# Altium PCB pcb.PcbDoc
Units mil, origin at the board's own origin, x right, y up, seen from the top; angles counter-clockwise.
Board outline 1440 x 940 mil, 2 copper layers (Top Layer, Bottom Layer), stack 62.8 mil thick; 26 components, 26 nets, 87 pads, 20 vias.
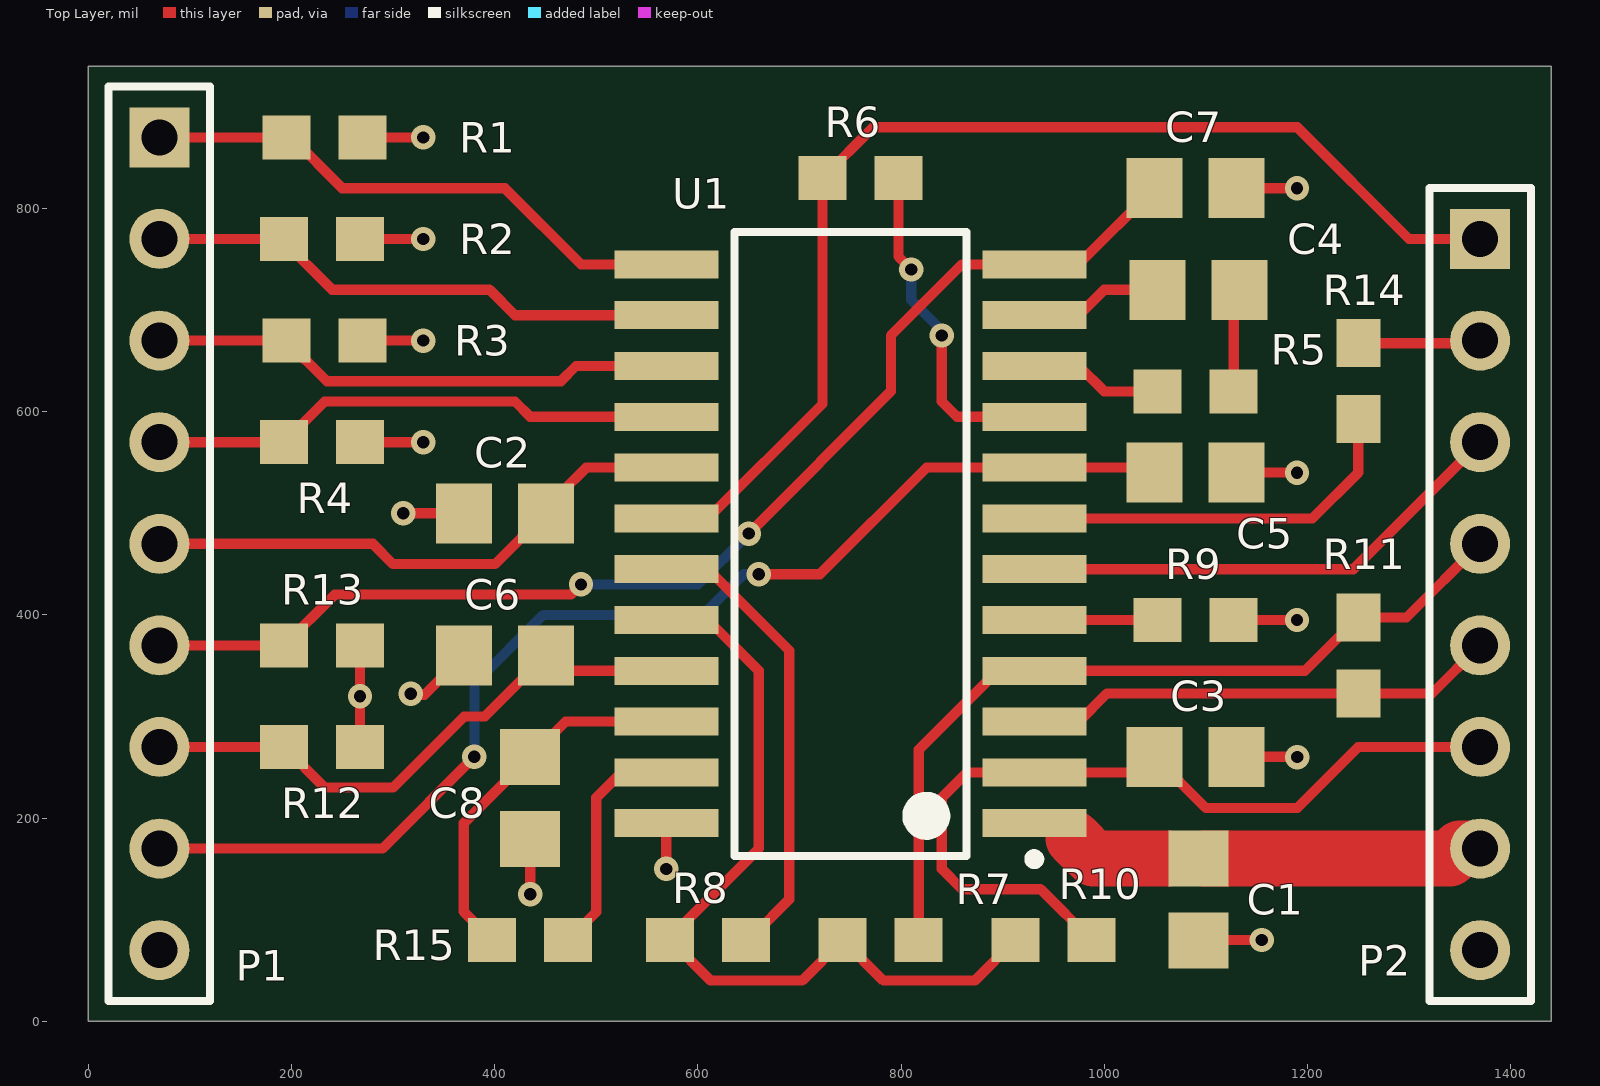
[diagram p0: Top Layer view]
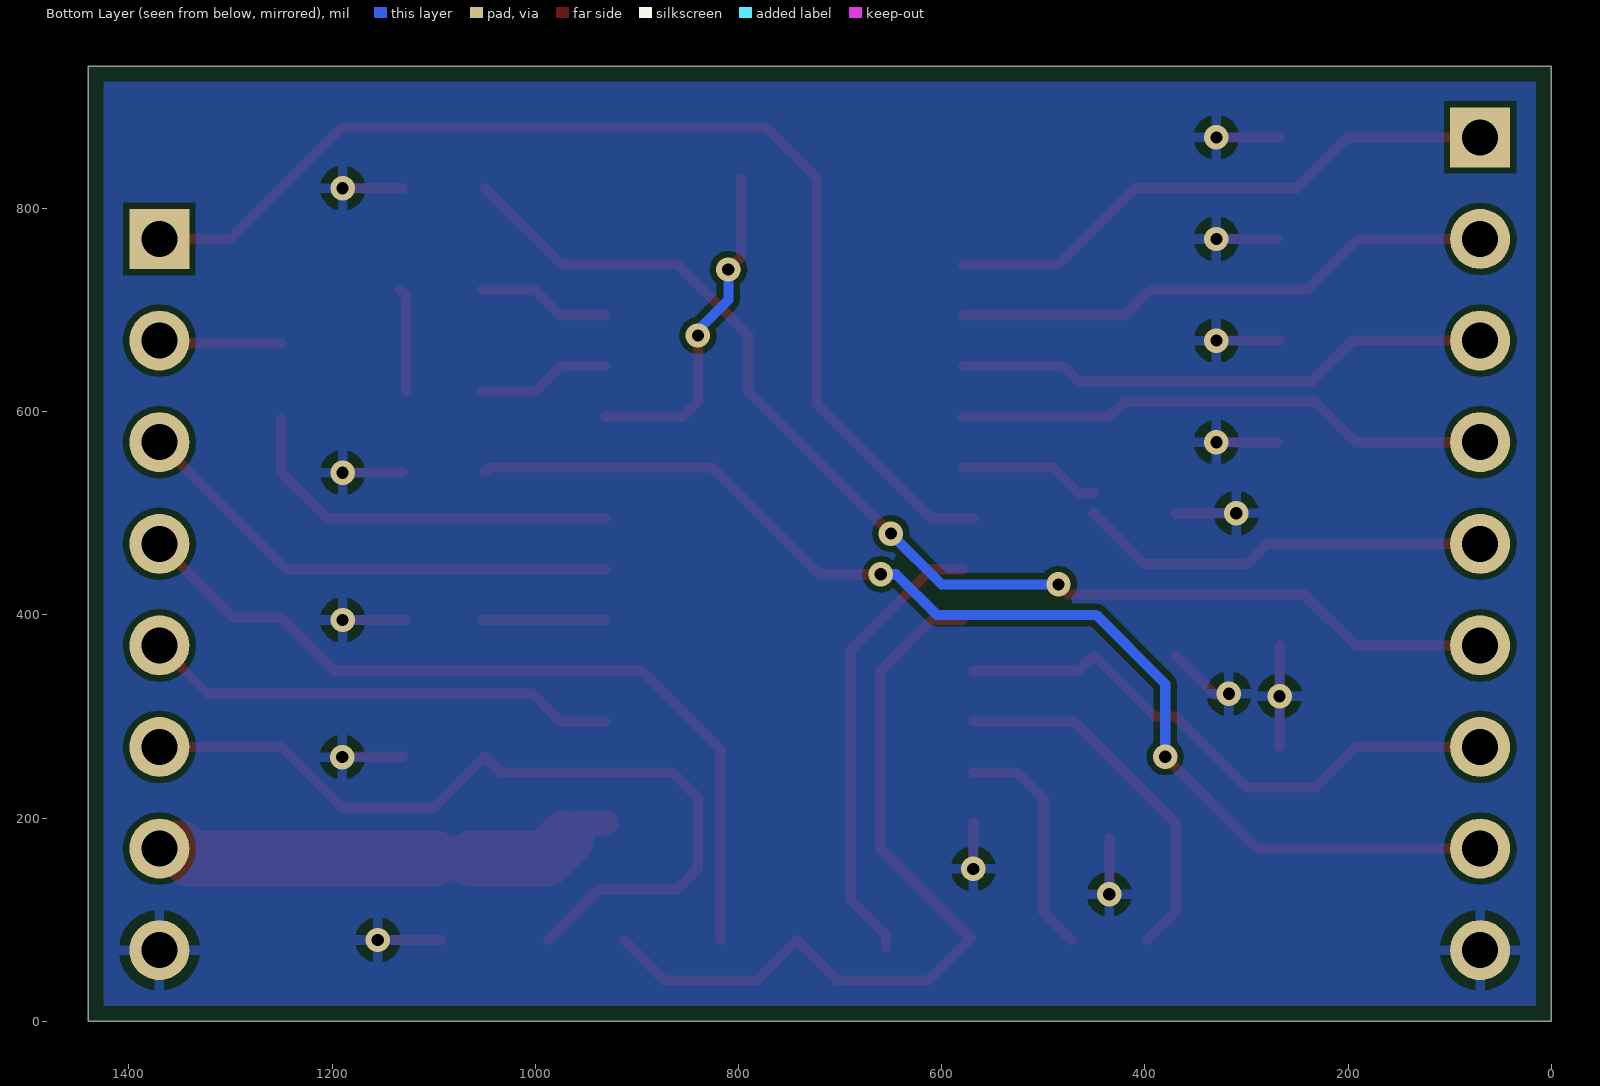
[diagram p1: Bottom Layer view, seen from below]

## Layer stack, top to bottom
Top Solder: solder mask 1, Solder Resist, Dk 3.5
Top Layer: signal copper 1.4
Dielectric 1: core 60, FR4, Dk 4.6
Bottom Layer: signal copper 1.4
Bottom Solder: solder mask 1, Solder Resist, Dk 3.5

## Board outline
0,0 1440,0 1440,940 0,940

## Design rules (kind name [scope] priority, off if disabled: settings)
BoardOutlineClearance [All] p1: gap=15 ignorepadtopadclearanceinfootprint=FALSE
Clearance [All] p1: gap=6 ignorepadtopadclearanceinfootprint=FALSE
HoleSize [All] p1: absolutevalues=TRUE maxlimit=100 minlimit=10 maxpercent=80.000 minpercent=20.000
MinimumAnnularRing [All] p1: minimumring=5
MinimumSolderMaskSliver [All] p1: minsoldermaskwidth=4
PlaneConnect [All] p1: planeconnectstyle=Direct reliefexpansion=20 reliefentries=4 reliefconductorwidth=10 reliefairgap=10
PolygonConnect [All] p1: connectstyle=Relief reliefconductorwidth=10 reliefentries=4 polygonreliefangle="90 Angle" airgapwidth=10
RoutingVias [All] p1: holewidth=6 width=16 viastyle="Through Hole" minholewidth=6 minwidth=16 maxholewidth=28 maxwidth=50
SolderMaskExpansion [All] p1: expansion=4
Width [All] p1: maxlimit=100 minlimit=6 preferedwidth=10 minimp=50.000000 maximp=50.000000 favimp=50.000000
27 further rules are at their usual default settings.

## Components (designator, comment, footprint, x,y, rotation, side; value= is the part's Value field where it differs from the comment)
C1 "Generic 0805 Capacitor" 0805 1092.95,120 r90 top
C2 "Generic 0805 Capacitor" 0805 410,500 r180 top
C3 "Generic 0805 Capacitor" 0805 1090,260.35 r0 top
C4 "Generic 0805 Capacitor" 0805 1092.95,720 r0 top
C5 "Generic 0805 Capacitor" 0805 1090,540 r0 top
C6 "Generic 0805 Capacitor" 0805 410,360 r0 top
C7 "Generic 0805 Capacitor" 0805 1090,820 r180 top
C8 "Generic 0805 Capacitor" 0805 435,220 r90 top
P1 "Header 9" HDR1X9 70,870 r270 top
P2 "Header 8" HDR1X8 1370,770 r270 top
R1 "Generic 0603 Resistor" 0603 232.6,870 r0 top
R2 "Generic 0603 Resistor" 0603 230,770 r0 top
R3 "Generic 0603 Resistor" 0603 232.6,670 r0 top
R4 "Generic 0603 Resistor" 0603 230,570 r0 top
R5 "Generic 0603 Resistor" 0603 1090,620 r180 top
R6 "Generic 0603 Resistor" 0603 760,830 r0 top
R7 "Generic 0603 Resistor" 0603 780,80 r180 top
R8 "Generic 0603 Resistor" 0603 610,80 r0 top
R9 "Generic 0603 Resistor" 0603 1090,395 r0 top
R10 "Generic 0603 Resistor" 0603 950,80 r180 top
R11 "Generic 0603 Resistor" 0603 1250,360 r90 top
R12 "Generic 0603 Resistor" 0603 230,270 r180 top
R13 "Generic 0603 Resistor" 0603 230,370 r180 top
R14 "Generic 0603 Resistor" 0603 1250,630 r270 top
R15 "Generic 0603 Resistor" 0603 435,80 r180 top
U1 "CJ125" SOIC-24 750,470 r180 top

## Footprints (in the part's own frame and the unit in brackets; to place one, negate y for a bottom-side part, rotate by r counter-clockwise, add the part's x,y. Pads: shape width x height; smd on the part's side, far side on the other; paste and mask are expansions set on the pad)
0603 [mm] "0603 - Based on VIshey Recommendations"
  rect 1.2x1.1 smd mask+0.1: 1(-0.95,0) 2(0.95,0)
  body extent -0.8,-0.4 0.8,0.4, height 0.76
0805 [mm] "0805 - Based on VIshey Recommendations"
  rect 1.4x1.5 smd mask+0.1: 1(-1.025,0) 2(1.025,0)
  body extent -1,-0.63 1,0.63, height 1.02
HDR1X8 [mm] "Connector; Header; 8 Position"
  rect 1.5x1.5 hole 0.9: 1(0,0)
  round 1.5 hole 0.9: 2(2.54,0) 3(5.08,0) 4(7.62,0) 5(10.16,0) 6(12.7,0) 7(15.24,0) 8(17.78,0)
  silkscreen extent -1.27,-1.27 19.05,1.27
HDR1X9 [mm] "Connector; Header; 9 Position"
  rect 1.5x1.5 hole 0.9: 1(0,0)
  round 1.5 hole 0.9: 2(2.54,0) 3(5.08,0) 4(7.62,0) 5(10.16,0) 6(12.7,0) 7(15.24,0) 8(17.78,0) 9(20.32,0)
  silkscreen extent -1.27,-1.27 21.59,1.27
SOIC-24 [mm] "SOIC, 24-Leads, Body 15.4x7.5mm, Pitch 1.27mm, IPC Low Density"
  rect 2.6x0.7 smd: 1(-4.6,6.985) 2(-4.6,5.715) 3(-4.6,4.445) 4(-4.6,3.175) 5(-4.6,1.905) 6(-4.6,0.635) 7(-4.6,-0.635) 8(-4.6,-1.905) 9(-4.6,-3.175) 10(-4.6,-4.445) 11(-4.6,-5.715) 12(-4.6,-6.985) 13(4.6,-6.985) 14(4.6,-5.715) 15(4.6,-4.445) 16(4.6,-3.175) 17(4.6,-1.905) 18(4.6,-0.635) 19(4.6,0.635) 20(4.6,1.905) 21(4.6,3.175) 22(4.6,4.445) 23(4.6,5.715) 24(4.6,6.985)
  silkscreen extent -4.72,-7.8 2.9,8.01, body extent -5.26,-7.72 5.26,7.72, height 1.7

## Part data
C1 C2 C3 C4 C5 C6 C7 C8: library part C_0805
P1: "Header, 9-Pin", LatestRevisionDate=17-Jul-2002, LatestRevisionNote="Re-released for DXP Platform.", Publisher="Altium Limited"
P2: "Header, 8-Pin", LatestRevisionDate=17-Jul-2002, LatestRevisionNote="Re-released for DXP Platform.", Publisher="Altium Limited"
R1 R2 R3 R4 R5 R6 R7 R8 R9 R10 R11 R12 R13 R14 R15: library part R_0603
U1: "5V 2Mbaud SMT Lambda Probe Interface IC - SOIC-24", Package Reference=SOIC-24, Supplier Part Number 1=0272240104, Supplier 1="Future Electronics"

## Via types
v1: diameter 24, hole 12, Top Layer to Bottom Layer, 20 vias

## Nets (pads, with @x,y where several pads share a name; then routed paths per layer and width w, separated by ;. In a path a pad name is that pad's centre, name@x,y a point inside that pad or via, vN(x,y) a via of type N, cw(c..) or ccw(c..) an arc to the next point about the centre after c; other vN are vias at no path point)
5V: C2.1 P1.5 U1.17 | length 548.2
  Top Layer w10: P1.5 280,470 300,450 400.35,450 C2.1 ; C2.1@450.35,520 465,520 490,545 U1.17 U1.17@578.9,545
12V: C1.2 P2.7 U1.1 | length 397.8
  Top Layer w26: U1.1 U1.1@955,195
  Top Layer w55: 969.65,180 989.29,160.35 1062.95,160.35 ; C1.2@1099.09,160.35 1340,160.35 1350,170.35 P2.7@1367.4,170.35
DIAHD: P2.2 R14.1 | length 121.1
  Top Layer w10: R14.1 1367.4,667.4 P2.2
DIAHG: P2.3 U1.6 | length 490.7
  Top Layer w10: U1.6 1245,445 P2.3
GND: C1.1 C2.2 C3.2 C5.2 C6.1 C7.1 C8.1 P1.9 P2.8 R1.2 R2.2 R3.2 R4.2 R9.2 R12.1 R13.1 U1.24 | length 875.7
  Top Layer w10: R12.1 v1(267.4,320) R13.1 ; R3.2@267.4,670 R3.2 v1(329.65,670) ; R1.2@267.4,870 R1.2 v1(329.65,870) ; R4.2@269.8,570 v1(329.65,570) ; R2.2@269.8,770 v1(329.65,770) ; v1(310,500) C2.2 ; v1(317.32,322.32) 318.31,321.34 330.98,321.34 C6.1 ; v1(435,125) C8.1 ; v1(568.9,150) U1.24 ; C1.1 1092.6,80 v1(1155,80) ; R9.2 v1(1189.65,395) ; C3.2 1189.65,260.35 v1(1190,260) ; C5.2 v1(1189.65,540) ; C7.1 v1(1189.65,820)
IA: P2.4 R7.1 R11.2 U1.4 | length 823.9
  Top Layer w10: R7.1 817.4,267.4 895,345 U1.4 1197.6,345 R11.2 1297.4,397.4 P2.4
IP: P2.5 R11.1 U1.3 | length 470
  Top Layer w10: U1.3 975,295 1002.6,322.6 R11.1 1322.6,322.6 P2.5
NetC4_1: C4.1 U1.11 | length 131.9
  Top Layer w10: U1.11 975,695 1000,720 C4.1
NetC4_2: C4.2 R5.1 | length 102.4
  Top Layer w10: R5.1 1127.4,714.09 C4.2
NetC8_2: C8.2 R15.2 U1.22 | length 367.3
  Top Layer w10: R15.2 369.65,107.95 369.65,195 C8.2 469.65,295 U1.22
NetR5_2: R5.2 U1.10 | length 131.9
  Top Layer w10: U1.10 975,645 1000,620 R5.2
NetR6_2: R6.2 U1.9 | length 338.1
  Top Layer w10: R6.2 797.4,752.6 v1(810,740) ; v1(840,675) 840,610 855,595 U1.9
  Bottom Layer w10: v1@802.5,740 810,732.5 810,710 840,680 v1(840,675)
NetR7_2: R7.2 R8.1 R10.2 U1.20 | length 808.5
  Top Layer w10: R8.1@571.3,81.3 660,170 660,345 610,395 U1.20@578.9,395 ; R8.1 612.6,40 702.6,40 R7.2 782.6,40 872.6,40 R10.2
NetR8_2: R8.2 U1.19 | length 451.3
  Top Layer w10: U1.19@578.9,445 610,445 690,365 690,120 654.9,84.9 R8.2@654.9,72.5
NetR9_1: R9.1 U1.5 | length 121.5
  Top Layer w10: U1.5 R9.1
NetR14_2: R14.2 U1.7 | length 390.1
  Top Layer w10: U1.7 1205,495 1250,540 R14.2
NetR15_1: R15.1 U1.23 | length 230.7
  Top Layer w10: R15.1 500,107.6 500,220 525,245 U1.23
RST: C5.1 P1.8 U1.8 | length 1179
  Top Layer w10: P1.8 289.65,170 v1(380,260.35) ; v1(660,440) 720,440 825,545 U1.8 1044.65,545 C5.1
  Bottom Layer w10: v1(380,260.35) 380,332.02 447.98,400 605,400 645,440 v1(660,440)
SCK: P1.1 R1.1 U1.13 | length 560.7
  Top Layer w10: P1.1 R1.1 200,870 250,820 410,820 485,745 U1.13 U1.13@578.9,745
SI: P1.3 R3.1 U1.15 | length 531.7
  Top Layer w10: P1.3 195,670 235,630 465,630 480,645 U1.15 U1.15@578.9,645
SO: P1.2 R2.1 U1.14 | length 540
  Top Layer w10: P1.2 190,770 240,720 395,720 420,695 U1.14 U1.14@578.9,695
SS: P1.4 R4.1 U1.16 | length 531.7
  Top Layer w10: P1.4 R4.1 232.6,610 420,610 435,595 U1.16 U1.16@578.9,595
UA: C6.2 P1.7 R12.2 U1.21 | length 575.5
  Top Layer w10: P1.7 R12.2 232.6,230 300,230 370,300 390.35,300 C6.2 465.35,345 U1.21
UN: C3.1 P2.6 R10.1 U1.2 | length 838.8
  Top Layer w10: R10.1 937.4,130 860,130 840,150 840,220 865,245 U1.2 1034.29,245 C3.1 1100,210 1190,210 1250,270 P2.6
UR: C7.2 P1.6 R13.2 U1.12 | length 1198.3
  Top Layer w10: P1.6 R13.2 242.6,420 475,420 v1(485,430) ; v1(650,480) 790,620 790,675 860,745 U1.12 974.65,745 C7.2
  Bottom Layer w10: v1(485,430) 600,430 v1(650,480)
VM: P2.1 R6.1 U1.18 | length 1136.4
  Top Layer w10: U1.18 610,495 722.6,607.6 R6.1 772.6,880 1190,880 1300,770 P2.1

## Polygon pours and split planes (outlines as drawn)
GND on Bottom Layer "Bottom Layer-GND" (solid, pour order 4): 15,15 1425,15 1425,925 15,925

## Silkscreen, mask and mechanical layers (free items; w line width, h text height)
Mechanical 1:
  the board outline again, w10